# Altium PCB QuarkNPi-Bata0.2-220731.pcbdoc (part 1 of 2)
Units mil, origin at the board's own origin, x right, y up, seen from the top; angles counter-clockwise.
Board outline 5064.99 x 3999.99 mil, 2 copper layers (Top Layer, Bottom Layer); 141 components, 100 nets, 508 pads, 483 vias.
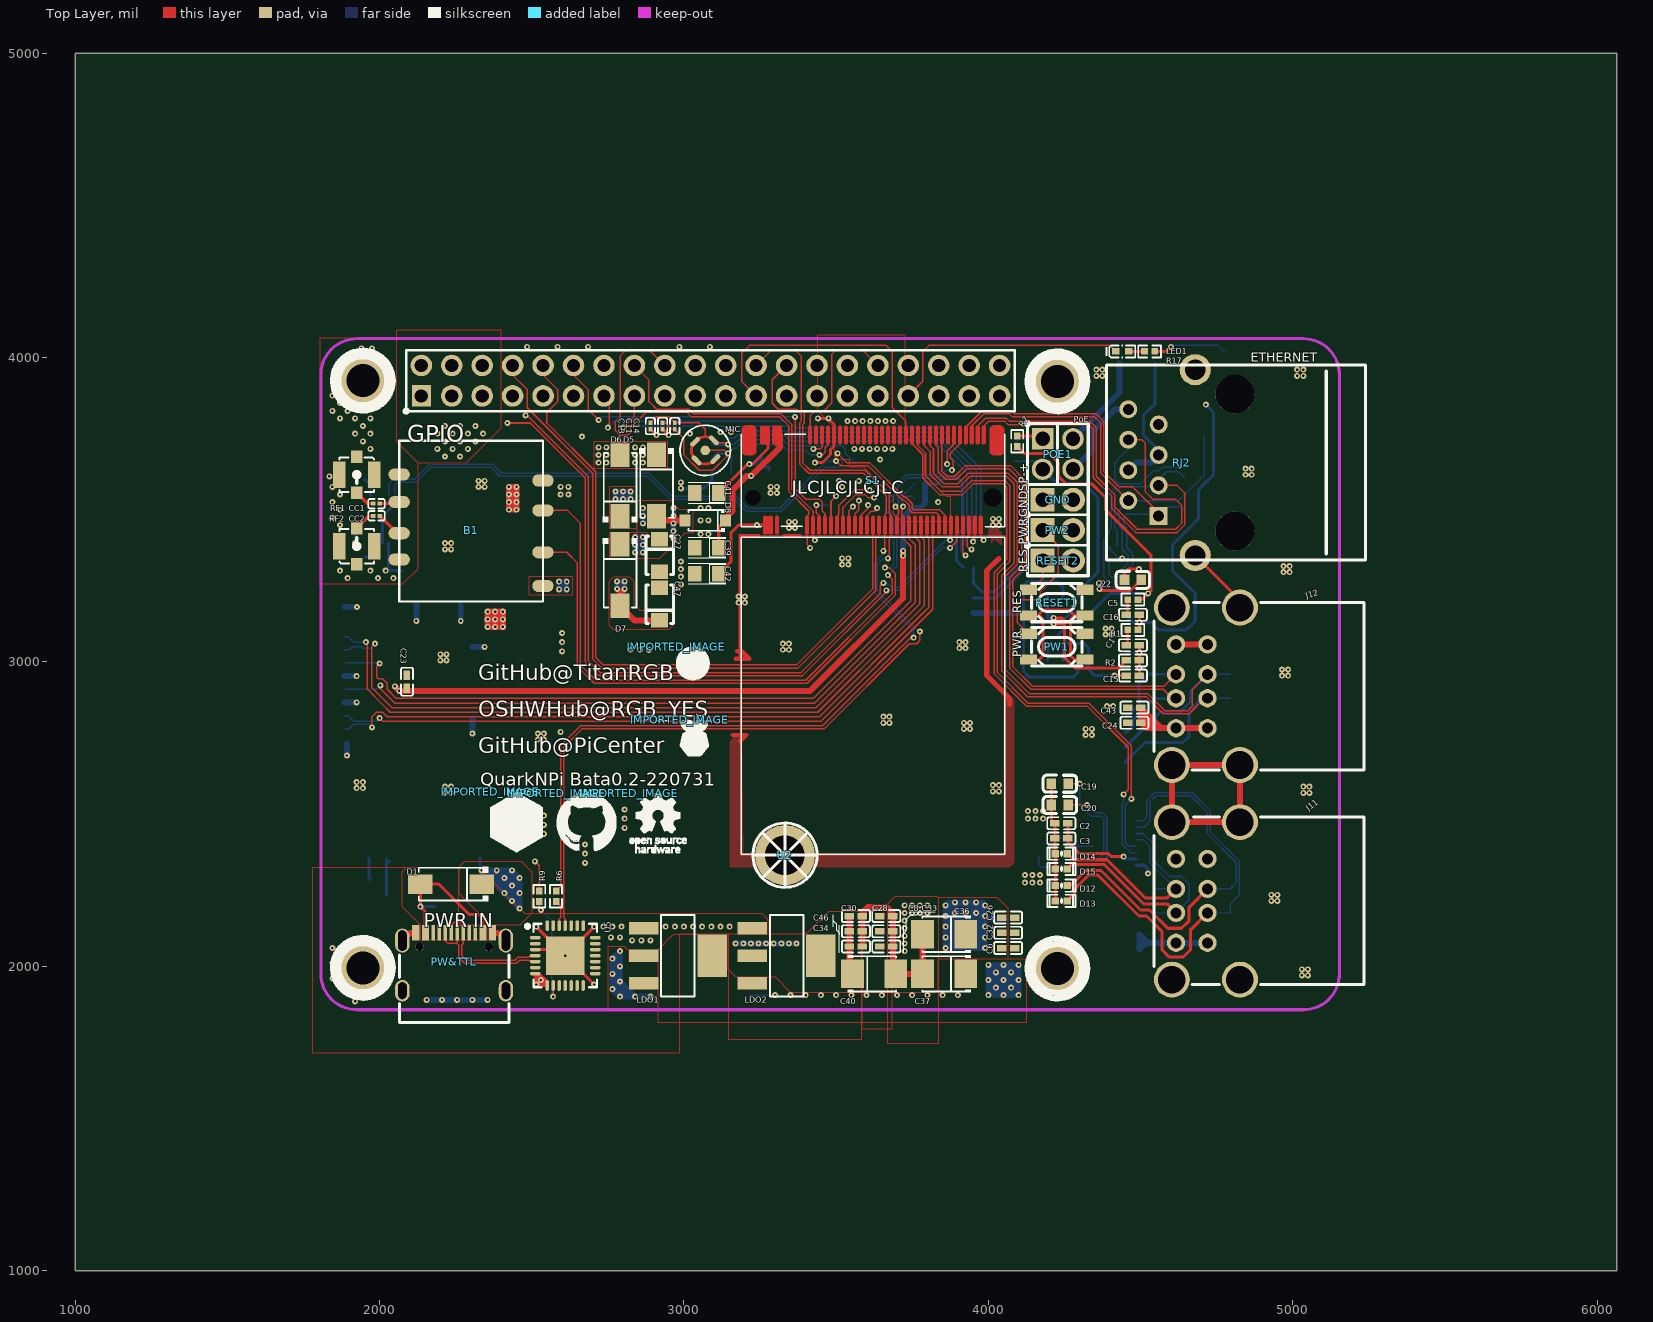
[diagram p0: Top Layer view]
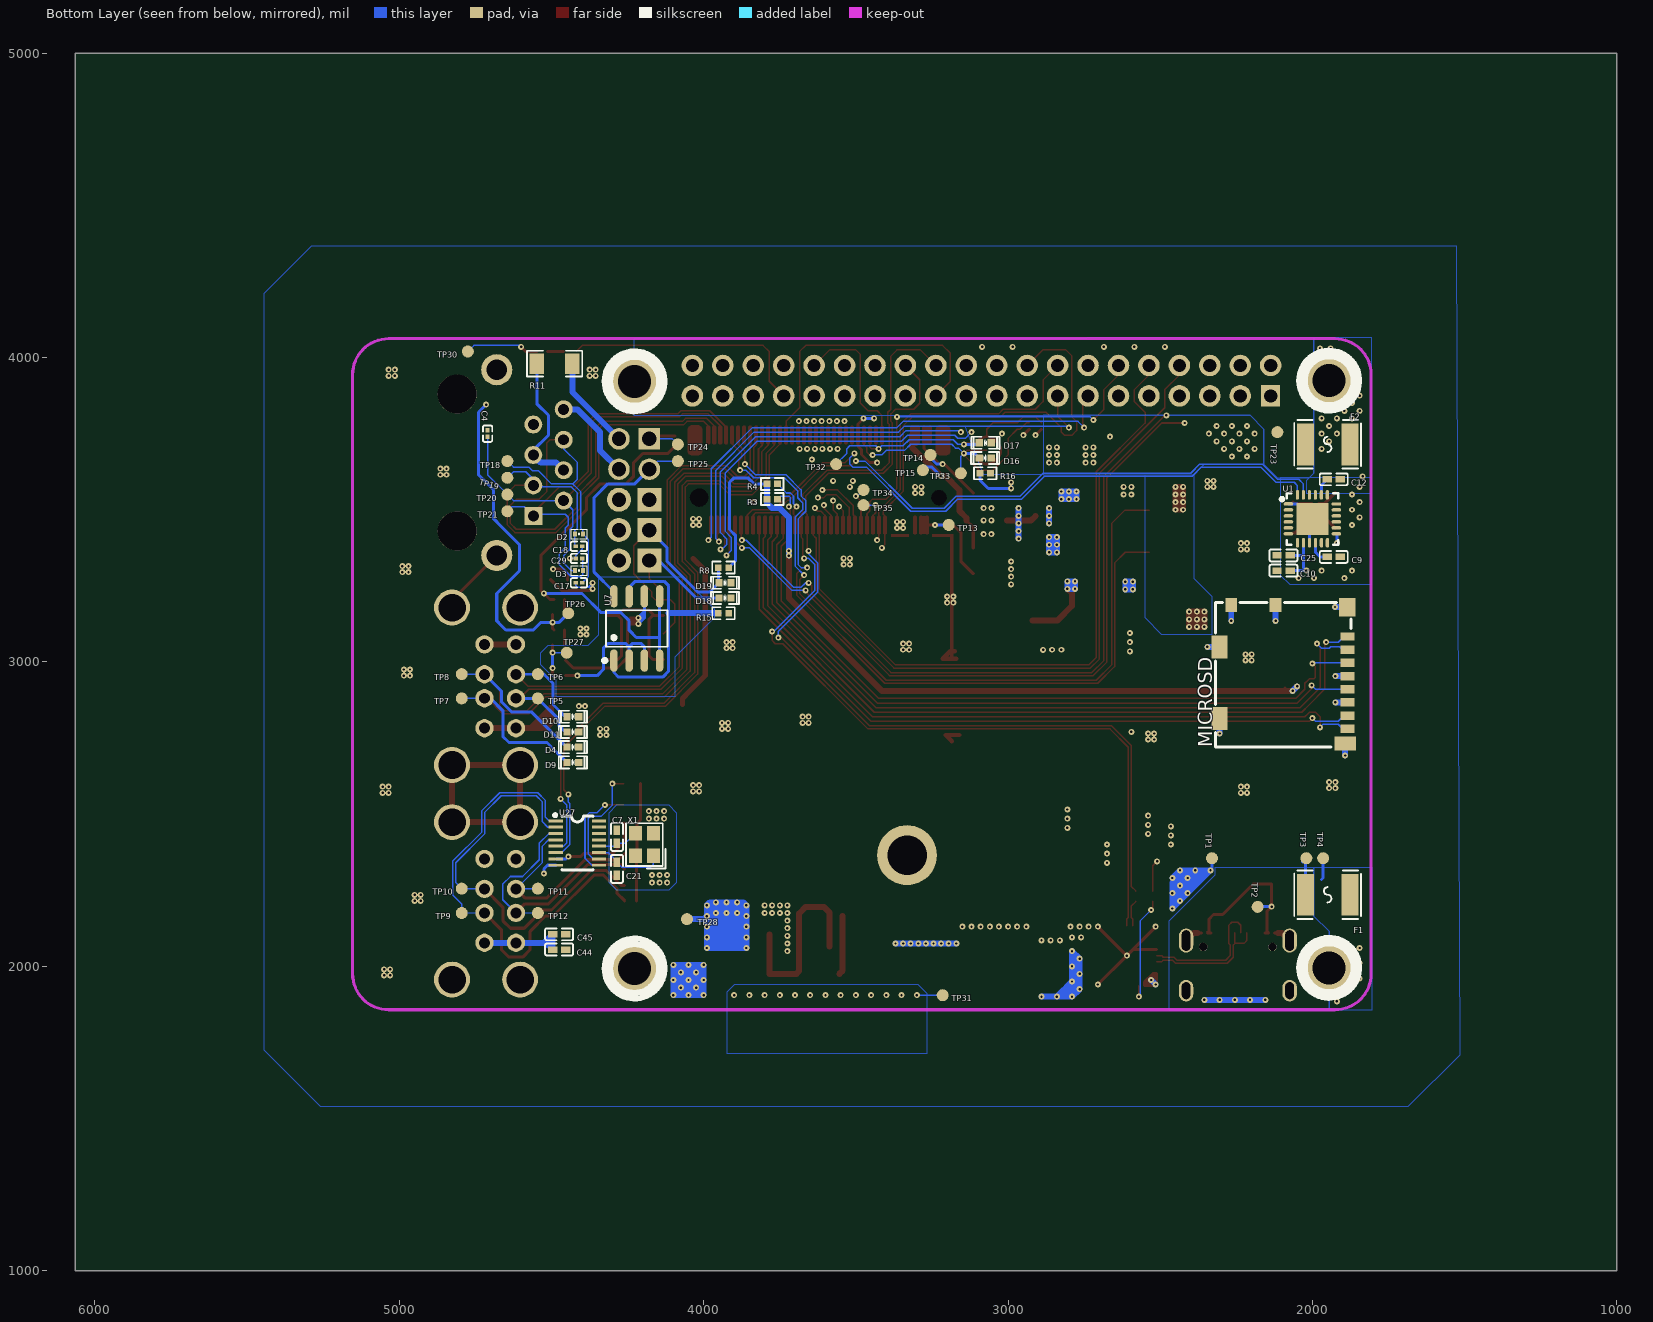
[diagram p1: Bottom Layer view, seen from below]

## Layer stack, top to bottom
Top Layer: signal copper (thickness not stored)
Dielectric: dielectric 12.6, FR-4, Dk 4.8
Bottom Layer: signal copper (thickness not stored)

## Board outline
6064.99,1000 1000,1000 1000,4999.99 6064.99,4999.99

## Components (designator, comment, footprint, x,y, rotation, side; value= is the part's Value field where it differs from the comment)
B1 "RTL8723BU" USB-WIFI-BT-RTL8723BU 2305,3465 r0 top
C1 "330nF" C0402#1 4474.99,3155 r180 top
C2 "22uF" C0402#1 4239.99,2470 r0 top
C3 "10uF" C0402#1 4240,2420 r0 top
C4 "1uF" C0201#1 4709.99,3750 r90 bottom
C5 "10uF" C0402#1 4474.99,3005 r0 top
C6 "100nF" C0402_NEW#1 4064.99,2060 r180 top
C7 "10pF" C0402#2 4284.99,2425 r270 bottom
C8 "100nF" C0402_NEW#1 3665,2115 r180 top
C9 "100nF" C0402_NEW#2 1930,3345 r180 bottom
C10 "10nF" C0402#2 2095,3300 r0 bottom
C11 "33pF" C0201#2 2930,3775 r270 top
C12 "2.2nF" C0402#2 1930,3600 r180 bottom
C13 "33pF" C0201#2 2890,3775 r90 top
C14 "100pF" C0201#2 2970,3775 r270 top
C15 "100nF" C0402#1 4474.99,3055 r0 top
C16 "1uF" C0402#1 4474.99,2955 r180 top
C17 "1uF" C0201#1 4410,3260 r180 bottom
C18 "1uF" C0201#1 4410,3380 r0 bottom
C19 "10uF" C0603 4234.99,2600 r180 top
C20 "10uF" C0603 4234.99,2530 r180 top
C21 "10pF" C0402#2 4284.99,2320 r270 bottom
C22 "1uF" C0603 4474.99,3270 r180 top
C23 "10uF" C0402#1 2090,2935 r270 top
C24 "10uF" C0402#1 4479.99,2800 r180 top
C25 "100nF" C0402_NEW#2 2095,3350 r0 bottom
C26 "10uF" C0402#1 4064.99,2160 r180 top
C27 "4.7uF" CAP-SMD_L3.2-W1.6 2920,3350 r270 top
C28 "10uF" C0402#1 3665,2165 r180 top
C29 "1uF" C0201#1 4410,3340 r0 bottom
C30 "10uF" C0402#1 3565,2165 r180 top
C32 "22uF" C0402#1 4064.99,2110 r180 top
C33 "22uF" C0402#1 3665,2065 r180 top
C34 "22uF" C0402#1 3565,2065 r180 top
C36 "100uF" CAP-SMD_L3.2-W2.8-FD 3855,2105 r180 top
C37 "100uF" CAP-SMD_L3.2-W2.8-FD 3855,1975 r180 top
C39 "22uF" CAP-SMD_L2.0-W1.3-FD 3075,3375 r180 top
C40 "100uF" CAP-SMD_L3.2-W2.8-FD 3625,1975 r0 top
C41 "22uF" CAP-SMD_L2.0-W1.3-FD 3075,3555 r180 top
C42 "22uF" CAP-SMD_L2.0-W1.3-FD 3075,3290 r180 top
C43 "22uF" C0402#1 4479.99,2850 r180 top
C44 "22uF" C0402#2 4474.99,2055 r0 bottom
C45 "10uF" C0402#2 4474.99,2105 r0 bottom
C46 "100nF" C0402_NEW#1 3565,2115 r180 top
C47 "4.7uF" CAP-SMD_L3.2-W1.6 2920,3190 r90 top
CC1 "10pF" C0201#2 1990,3520 r180 top
CC2 "10pF" C0201#2 1990,3480 r180 top
D1 "SS510G" SMA_L4.4-W2.8-LS5.4-RD 2235,2270 r180 top
D2 "EGA10201V05A0" D0201-BI 4409.99,3420 r0 bottom
D3 "EGA10201V05A0" D0201-BI 4409.99,3300 r0 bottom
D4 "ESD5451N-TP" D0402-BI#1 4429.99,2720 r180 bottom
D5 "SS510G" SMA_L4.4-W2.8-LS5.4-RD 2910,3580 r270 top
D6 "SS510G" SMA_L4.4-W2.8-LS5.4-RD 2790,3580 r90 top
D7 "SS510G" SMA_L4.4-W2.8-LS5.4-RD 2790,3285 r270 top
D8 "PMEG4030ER,115" SOD-123_L2.6-W1.7-LS3.5-RD 3070,3465 r180 top
D9 "ESD5451N-TP" D0402-BI#1 4429.99,2670 r180 bottom
D10 "ESD5451N-TP" D0402-BI#1 4429.99,2820 r180 bottom
D11 "ESD5451N-TP" D0402-BI#1 4429.99,2770 r180 bottom
D12 "ESD5451N-TP" D0402-BI#2 4240,2265 r0 top
D13 "ESD5451N-TP" D0402-BI#2 4240,2215 r0 top
D14 "ESD5451N-TP" D0402-BI#2 4240,2370 r0 top
D15 "ESD5451N-TP" D0402-BI#2 4240,2320 r0 top
D16 "ESD5451N-TP" D0402-BI#1 3075,3670 r0 bottom
D17 "ESD5451N-TP" D0402-BI#1 3075,3720 r180 bottom
D18 "ESD5451N-TP" D0402-BI#1 3930,3210 r180 bottom
D19 "ESD5451N-TP" D0402-BI#1 3930,3260 r180 bottom
F1 "mSMD400" F1812 1950,2235 r180 bottom
F2 "mSMD400" F1812 1950,3715 r180 bottom
GND "KH-2.54PH180-1X2P-L11.5" HDR-TH_2P-P2.54-V-M 4228.5,3532.8 r0 top
GPIO "Header-Male-2.54_2x20" HDR-TH_40P-P2.54-V-M-R2-C20-S2.54 3087.2,3924.1 r0 top
IMPORTED_IMAGE "IMPORTED_IMAGE" IMPORTED_IMAGE 2364.15,2573.02 r0 top
IMPORTED_IMAGE "IMPORTED_IMAGE" IMPORTED_IMAGE 2986.92,2809.79 r0 top
IMPORTED_IMAGE "IMPORTED_IMAGE" IMPORTED_IMAGE 2974.21,3050.2 r0 top
IMPORTED_IMAGE "IMPORTED_IMAGE" IMPORTED_IMAGE 2821.14,2568.44 r0 top
IMPORTED_IMAGE "IMPORTED_IMAGE" IMPORTED_IMAGE 2582.03,2569.12 r0 top
J11 "USB-HUB" USB-A-TH_U-USBAR04P-F201 4715,2215 r90 top
J12 "USB-CORE" USB-A-TH_U-USBAR04P-F201 4715,2920 r90 top
LDO1 "1117-5v" SOT-223_L6.5-W3.5-P2.30-LS7.0-BR 2980,2035 r180 top
LDO2 "1117-3V3" SOT-223_L6.5-W3.5-P2.30-LS7.0-BR 3337.65,2035 r180 top
LED1 "WHITE" LED0402-RD_YELLOW 4439.99,4019.99 r0 top
MIC "GMI4013S-2C54DB" MIC-SMD_BD4.0_B4013AM423-008 3070,3695 r0 top
MICROSD "1040310811" SIM-SMD_8P-1040310811 2094.96,2959.96 r270 bottom
POE1 "210-72-02GB01" HDR-TH_4P-P2.54-V-R2-C2-S2.54_A2541WV-2X2P 4228.47,3682.82 r270 top
PW1 "ST-1188" SW-SMD_4P-L4.2-W3.2-P2.15-LS5.2 4225,3049.99 r90 top
PW2 "KH-2.54PH180-1X2P-L11.5" HDR-TH_2P-P2.54-V-M 4228.47,3433.22 r0 top
PW&TTL "KH-TYPE-C-16P" USB-C-SMD_KH-TYPE-C-16P 2244.99,2014.99 r0 top
R1 "20K" R0402#1 4474.99,3205 r0 top
R2 "22Ω" R0402#1 4474.99,3105 r0 top
R3 "47K" R0402#2 3775,3535 r0 bottom
R4 "47K" R0402#2 3775,3585 r0 bottom
R6 "200Ω" R0402#1 2580,2230 r90 top
R7 "75kΩ" R0402#1 4094.99,3725 r90 top
R8 "10kΩ" R0402#2 3935,3310 r180 bottom
R9 "10K" R0402#1 2525,2230 r270 top
R11 "10Ω" R1206 4489.99,3979.99 r0 bottom
R15 "0Ω" R0402#2 3935,3160 r0 bottom
R16 "0Ω" R0402#2 3075,3620 r180 bottom
R17 "470Ω" R0402#1 4529.99,4019.99 r180 top
RESET1 "ST-1188" SW-SMD_4P-L4.2-W3.2-P2.15-LS5.2 4225,3195 r90 top
RESET2 "KH-2.54PH180-1X2P-L11.5" HDR-TH_2P-P2.54-V-M 4228.47,3333.22 r0 top
RF1 "HC-RF-IPEX0303-01" IPEX-SMD_HC-RF-IPEX0303-01 1925,3615 r0 top
RF2 "HC-RF-IPEX0303-01" IPEX-SMD_HC-RF-IPEX0303-01 1925,3380 r180 top
RJ2 "13F-60NW2NL" RJ45-TH_8P-P2.54-S2.54_L21.6-W16.3-EH11.4 4570,3655 r90 top
S1 "Core" QUANTUM-QUARK-N 3680,2940 r90 top
TP1 "TP测试点" TP测试点 2330,2355 r0 bottom
TP2 "TP测试点" TP测试点 2180,2195 r0 bottom
TP3 "TP测试点" TP测试点 2020,2355 r0 bottom
TP4 "TP测试点" TP测试点 1965,2355 r0 bottom
TP5 "TP测试点" TP测试点 4545,2880 r0 bottom
TP6 "TP测试点" TP测试点 4545,2960 r0 bottom
TP7 "TP测试点" TP测试点 4795,2880 r0 bottom
TP8 "TP测试点" TP测试点 4795,2960 r0 bottom
TP9 "TP测试点" TP测试点 4795,2175 r0 bottom
TP10 "TP测试点" TP测试点 4795,2255 r0 bottom
TP11 "TP测试点" TP测试点 4545,2255 r0 bottom
TP12 "TP测试点" TP测试点 4545,2175 r0 bottom
TP13 "TP测试点" TP测试点 3195,3450 r0 bottom
TP14 "TP测试点" TP测试点 3255,3680 r0 bottom
TP15 "TP测试点" TP测试点 3280,3630 r0 bottom
TP18 "TP测试点" TP测试点 4644.99,3660 r0 bottom
TP19 "TP测试点" TP测试点 4644.99,3605 r0 bottom
TP20 "TP测试点" TP测试点 4644.99,3550 r0 bottom
TP21 "TP测试点" TP测试点 4644.99,3495 r0 bottom
TP23 "TP测试点" TP测试点 2115,3755 r0 bottom
TP24 "TP测试点" TP测试点 4084.99,3715 r0 bottom
TP25 "TP测试点" TP测试点 4084.99,3660 r0 bottom
TP26 "TP测试点" TP测试点 4444.99,3160 r0 bottom
TP27 "TP测试点" TP测试点 4449.99,3030 r0 bottom
TP28 "TP测试点" TP测试点 4054.99,2155 r0 bottom
TP30 "TP测试点" TP测试点 4774.99,4019.99 r0 bottom
TP31 "TP测试点" TP测试点 3215,1905 r0 bottom
TP32 "TP测试点" TP测试点 3565,3650 r0 bottom
TP33 "TP测试点" TP测试点 3155,3620 r0 bottom
TP34 "TP测试点" TP测试点 3475,3565 r0 bottom
TP35 "TP测试点" TP测试点 3475,3515 r0 bottom
U1 "MPU-6050_C24112" QFN-24_L4.0-W4.0-P0.50-BL-EP2.7 2000,3470 r90 bottom
U2 "SMTWE2015MTJ" M.2螺孔 3332,2365 r0 top
U5 "CP2102-GMR" WQFN-28_L5.0-W5.0-P0.50-BL-EP3.2 2610,2035 r270 top
U7 "LM4871" SOP-8_L4.9-W3.9-P1.27-LS6.0-BL 4219.99,3110 r0 bottom
U27 "SL2.1S" SSOP-16_L4.6-W2.6-P0.53-LS4.0-BL 4414.99,2405 r90 bottom
X1 "12Mhz" OSC-SMD_4P-L2.5-W2.0-BL 4194.99,2400 r270 bottom

## Footprints (in the part's own frame and the unit in brackets; to place one, negate y for a bottom-side part, rotate by r counter-clockwise, add the part's x,y. Pads: shape width x height; smd on the part's side, far side on the other; paste and mask are expansions set on the pad)
C0201#1 [mil]
  rect 14.51x12.76 smd: 1(10.8,0) 2(-10.8,0)
  silkscreen extent -27,-15 27,15
C0201#2 [mil]
  rect 14.51x12.76 smd: 1(-10.8,0) 2(10.8,0)
  silkscreen extent -27,-15 27,15
C0402#1 [mm]
  rect 0.79x0.54 smd: 1(-0.545,0) 2(0.545,0)
  silkscreen extent -1.17,-0.5 1.17,0.5
C0402#2 [mm]
  rect 0.79x0.54 smd: 1(0.545,0) 2(-0.545,0)
  silkscreen extent -1.17,-0.5 1.17,0.5
C0402_NEW#1 [mm]
  rect 0.79x0.54 smd: 1(-0.545,0) 2(0.545,0)
  silkscreen extent -1.17,-0.5 1.17,0.5
C0402_NEW#2 [mm]
  rect 0.79x0.54 smd: 1(0.545,0) 2(-0.545,0)
  silkscreen extent -1.17,-0.5 1.17,0.5
C0603 [mm]
  rect 0.8x0.9 smd: 1(-0.7,0) 2(0.7,0)
  silkscreen extent -1.41,-0.71 1.39,0.72
CAP-SMD_L2.0-W1.3-FD [mm]
  rect 1.1x1.3 smd: 1(-1,0) 2(1,0)
  silkscreen extent -1.57,-0.89 1.52,0.89
CAP-SMD_L3.2-W1.6 [mm]
  rect 1.2x1.4 smd: 1(-1.35,0) 2(1.35,0)
  silkscreen extent -1.6,-1.14 1.6,1.14
CAP-SMD_L3.2-W2.8-FD [mm]
  rect 1.9x2.376 smd: 1(-1.799,0) 2(1.798,0)
  silkscreen extent -2.21,-1.55 1.83,1.55
D0201-BI [mil]
  rect 13.8x16 smd: 1(13,0) 2(-13,0)
  silkscreen extent -27,-15 27,15
D0402-BI#1 [mm]
  rect 0.6x0.6 smd: 1(0.5,0) 2(-0.5,0)
  silkscreen extent -1.17,-0.51 1.18,0.5
D0402-BI#2 [mm]
  rect 0.6x0.6 smd: 1(-0.5,0) 2(0.5,0)
  silkscreen extent -1.18,-0.5 1.17,0.51
F1812 [mil]
  rect 55.38x137.76 smd: 1(72.97,0) 2(-72.97,0)
  silkscreen extent -110,-80 110,80
HDR-TH_2P-P2.54-V-M [mm]
  rect 2x2 hole 1.2: 1(-1.27,0)
  round 2 hole 1.2: 2(1.27,0)
  silkscreen extent -2.54,-1.27 2.54,1.27
HDR-TH_4P-P2.54-V-R2-C2-S2.54_A2541WV-2X2P [mm]
  rect 1.8x1.8 hole 1.2: 1(-1.27,-1.27)
  round 1.8 hole 1.2: 2(-1.27,1.27) 3(1.27,-1.27) 4(1.27,1.27)
  silkscreen extent -2.54,-2.54 2.54,2.54
HDR-TH_40P-P2.54-V-M-R2-C20-S2.54 [mm]
  rect 1.575x1.8 hole 1.1: 1(-24.13,-1.27)
  round 1.8 hole 1.1: 2(-24.13,1.27) 3(-21.59,-1.27) 4(-21.59,1.27) 5(-19.05,-1.27) 6(-19.05,1.27) 7(-16.51,-1.27) 8(-16.51,1.27) 9(-13.97,-1.27) 10(-13.97,1.27) 11(-11.43,-1.27) 12(-11.43,1.27) 13(-8.89,-1.27) 14(-8.89,1.27) 15(-6.35,-1.27) 16(-6.35,1.27) 17(-3.81,-1.27) 18(-3.81,1.27) 19(-1.27,-1.27) 20(-1.27,1.27) 21(1.27,-1.27) 22(1.27,1.27) 23(3.81,-1.27) 24(3.81,1.27) 25(6.35,-1.27) 26(6.35,1.27) 27(8.89,-1.27) 28(8.89,1.27) 29(11.43,-1.27) 30(11.43,1.27) 31(13.97,-1.27) 32(13.97,1.27) 33(16.51,-1.27) 34(16.51,1.27) 35(19.05,-1.27) 36(19.05,1.27) 37(21.59,-1.27) 38(21.59,1.27) 39(24.13,-1.27) 40(24.13,1.27)
  silkscreen extent -25.4,-2.54 25.4,2.54
IMPORTED_IMAGE [mil]
  silkscreen extent 0,-199 172,0
IPEX-SMD_HC-RF-IPEX0303-01 [mm]
  rect 1x1.05 smd: 1(0,-1.5) 4(0,1.5)
  rect 1.05x2.2 smd: 2(1.475,0) 3(-1.475,0)
  silkscreen extent -1.45,-1.45 1.45,1.45
LED0402-RD_YELLOW [mm]
  rect 0.636x0.54 smd: 1(-0.538,0) 2(0.538,0)
  silkscreen extent -1.39,-0.54 1.09,0.54
M.2螺孔 [mm]
  round 5 hole 3.3: 1(0,0)
MIC-SMD_BD4.0_B4013AM423-008 [mm]
  round 0.8 smd: 1(0,0)
  oval 1x0.4 smd rot 45: 2(-0.844,0.725) 2(0.844,-0.725)
  oval 1x0.4 smd rot 135: 2(-0.725,-0.844) 2(0.725,0.844)
  silkscreen extent -2.1,-2.1 2.1,2.1
OSC-SMD_4P-L2.5-W2.0-BL [mm]
  rect 1.2x1.1 smd: 1(0.95,0.75) 2(-0.95,0.75) 3(-0.95,-0.75) 4(0.95,-0.75)
  silkscreen extent -1.78,-1.53 2.01,1.76
QFN-24_L4.0-W4.0-P0.50-BL-EP2.7 [mm]
  oval 0.28x0.8 smd: 1(1.25,2) 2(0.75,2) 3(0.25,2) 4(-0.25,2) 5(-0.75,2) 6(-1.25,2) 13(-1.25,-2) 14(-0.75,-2) 15(-0.25,-2) 16(0.25,-2) 17(0.75,-2) 18(1.242,-2)
  oval 0.8x0.28 smd: 7(-2,1.25) 8(-2,0.75) 9(-2,0.25) 10(-2,-0.25) 11(-2,-0.75) 12(-2,-1.25) 19(2,-1.25) 20(2,-0.75) 21(2,-0.25) 22(2,0.25) 23(2,0.75) 24(2,1.25)
  rect 2.7x2.7 smd: 25(-0.012,0)
  silkscreen extent -2.16,-2.15 2.14,2.79
QUANTUM-QUARK-N [mm]
  round 0 smd: 0(20.007,-8.851) 0(20.007,11.849) 1(20.464,10.749) 2(12.939,10.499) 3(20.464,10.249) 4(12.939,9.999) 5(20.464,9.749) 6(12.939,9.499) 7(20.464,9.249) 16(12.939,6.999) 17(20.464,6.749) 18(12.939,6.499) 19(20.464,6.249) 20(12.939,5.999) 21(20.464,5.749) 22(12.939,5.499) 23(20.464,5.249) 24(12.939,4.999) 25(20.464,4.749) 26(12.939,4.499) 27(20.464,4.249) 28(12.939,3.999) 29(20.464,3.749) 30(12.939,3.499) 31(20.464,3.249) 32(12.939,2.999) 33(20.464,2.749) 34(12.939,2.499) 35(20.464,2.249) 36(12.939,1.999) 37(20.464,1.749) 38(12.939,1.499) 39(20.464,1.249) 40(12.939,0.999) 41(20.464,0.749) 42(12.939,0.499) 43(20.464,0.249) 44(12.939,-0.001) 45(20.464,-0.251) 46(12.939,-0.501) 47(20.464,-0.751) 48(12.939,-1.001) 49(20.464,-1.251) 50(12.939,-1.501) 51(20.464,-1.751) 52(12.939,-2.001) 53(20.464,-2.251) 54(12.939,-2.501) 55(20.464,-2.751) 56(12.939,-3.001) 57(20.464,-3.251) 58(12.939,-3.501) 59(20.464,-3.751) 60(12.939,-4.001) 61(20.464,-4.251) 62(12.939,-4.501) 63(20.464,-4.751) 64(12.939,-5.001) 65(20.464,-5.251) 66(12.939,-5.501) 67(20.464,-5.751) 68(12.939,-6.001) 69(20.464,-6.251) 70(12.939,-6.501) 71(20.464,-6.751) 72(12.939,-7.001) 73(20.464,-7.251) 74(12.939,-7.501) 75(20.464,-7.751)
  round 0.6 hole 1.524 slot 1.529 at 90 deg unplated: MH1(15.24,-8.509)
  round 0.6 hole 1.27 slot 1.275 at 90 deg unplated: MH2(15.24,11.506)
  Top Layer region: 19.689,4.674 19.764,4.599 21.164,4.599 21.239,4.674 21.239,4.824 21.164,4.899 19.764,4.899 19.689,4.824
  Top Layer region: 19.689,4.174 19.764,4.099 21.164,4.099 21.239,4.174 21.239,4.324 21.164,4.399 19.764,4.399 19.689,4.324
  Top Layer region: 19.689,3.174 19.764,3.099 21.164,3.099 21.239,3.174 21.239,3.324 21.164,3.399 19.764,3.399 19.689,3.324
  Top Layer region: 19.689,3.674 19.764,3.599 21.164,3.599 21.239,3.674 21.239,3.824 21.164,3.899 19.764,3.899 19.689,3.824
  Top Layer region: 12.164,6.424 12.239,6.349 13.639,6.349 13.714,6.424 13.714,6.574 13.639,6.649 12.239,6.649 12.164,6.574
  Top Layer region: 12.164,6.924 12.239,6.849 13.639,6.849 13.714,6.924 13.714,7.074 13.639,7.149 12.239,7.149 12.164,7.074
  Top Layer region: 12.164,10.424 12.239,10.349 13.639,10.349 13.714,10.424 13.714,10.574 13.639,10.649 12.239,10.649 12.164,10.574
  Top Layer region: 12.164,9.924 12.239,9.849 13.639,9.849 13.714,9.924 13.714,10.074 13.639,10.149 12.239,10.149 12.164,10.074
  Top Layer region: 12.164,-6.576 12.239,-6.651 13.639,-6.651 13.714,-6.576 13.714,-6.426 13.639,-6.351 12.239,-6.351 12.164,-6.426
  Top Layer region: 12.164,-7.076 12.239,-7.151 13.639,-7.151 13.714,-7.076 13.714,-6.926 13.639,-6.851 12.239,-6.851 12.164,-6.926
  Top Layer region: 12.164,-7.576 12.239,-7.651 13.639,-7.651 13.714,-7.576 13.714,-7.426 13.639,-7.351 12.239,-7.351 12.164,-7.426
  Top Layer region: 19.689,9.174 19.764,9.099 21.164,9.099 21.239,9.174 21.239,9.324 21.164,9.399 19.764,9.399 19.689,9.324
  Top Layer region: 12.164,9.424 12.239,9.349 13.639,9.349 13.714,9.424 13.714,9.574 13.639,9.649 12.239,9.649 12.164,9.574
  Top Layer region: 12.164,-4.076 12.239,-4.151 13.639,-4.151 13.714,-4.076 13.714,-3.926 13.639,-3.851 12.239,-3.851 12.164,-3.926
  Top Layer region: 19.689,-3.826 19.764,-3.901 21.164,-3.901 21.239,-3.826 21.239,-3.676 21.164,-3.601 19.764,-3.601 19.689,-3.676
  Top Layer region: 12.164,0.424 12.239,0.349 13.639,0.349 13.714,0.424 13.714,0.574 13.639,0.649 12.239,0.649 12.164,0.574
  Top Layer region: 12.164,-3.576 12.239,-3.651 13.639,-3.651 13.714,-3.576 13.714,-3.426 13.639,-3.351 12.239,-3.351 12.164,-3.426
  Top Layer region: 12.164,1.924 12.239,1.849 13.639,1.849 13.714,1.924 13.714,2.074 13.639,2.149 12.239,2.149 12.164,2.074
  Top Layer region: 12.164,0.924 12.239,0.849 13.639,0.849 13.714,0.924 13.714,1.074 13.639,1.149 12.239,1.149 12.164,1.074
  Top Layer region: 12.164,-3.076 12.239,-3.151 13.639,-3.151 13.714,-3.076 13.714,-2.926 13.639,-2.851 12.239,-2.851 12.164,-2.926
  Top Layer region: 19.689,-4.326 19.764,-4.401 21.164,-4.401 21.239,-4.326 21.239,-4.176 21.164,-4.101 19.764,-4.101 19.689,-4.176
  Top Layer region: 12.164,-4.576 12.239,-4.651 13.639,-4.651 13.714,-4.576 13.714,-4.426 13.639,-4.351 12.239,-4.351 12.164,-4.426
  Top Layer region: 12.164,-5.076 12.239,-5.151 13.639,-5.151 13.714,-5.076 13.714,-4.926 13.639,-4.851 12.239,-4.851 12.164,-4.926
  Top Layer region: 19.689,-4.826 19.764,-4.901 21.164,-4.901 21.239,-4.826 21.239,-4.676 21.164,-4.601 19.764,-4.601 19.689,-4.676
  Top Layer region: 12.164,2.424 12.239,2.349 13.639,2.349 13.714,2.424 13.714,2.574 13.639,2.649 12.239,2.649 12.164,2.574
  Top Layer region: 19.689,1.674 19.764,1.599 21.164,1.599 21.239,1.674 21.239,1.824 21.164,1.899 19.764,1.899 19.689,1.824
  Top Layer region: 12.164,-0.576 12.239,-0.651 13.639,-0.651 13.714,-0.576 13.714,-0.426 13.639,-0.351 12.239,-0.351 12.164,-0.426
  Top Layer region: 12.164,-2.576 12.239,-2.651 13.639,-2.651 13.714,-2.576 13.714,-2.426 13.639,-2.351 12.239,-2.351 12.164,-2.426
  Top Layer region: 12.164,2.924 12.239,2.849 13.639,2.849 13.714,2.924 13.714,3.074 13.639,3.149 12.239,3.149 12.164,3.074
  Top Layer region: 19.689,2.174 19.764,2.099 21.164,2.099 21.239,2.174 21.239,2.324 21.164,2.399 19.764,2.399 19.689,2.324
  Top Layer region: 12.164,-0.076 12.239,-0.151 13.639,-0.151 13.714,-0.076 13.714,0.074 13.639,0.149 12.239,0.149 12.164,0.074
  Top Layer region: 12.164,-2.076 12.239,-2.151 13.639,-2.151 13.714,-2.076 13.714,-1.926 13.639,-1.851 12.239,-1.851 12.164,-1.926
  Top Layer region: 12.164,-1.576 12.239,-1.651 13.639,-1.651 13.714,-1.576 13.714,-1.426 13.639,-1.351 12.239,-1.351 12.164,-1.426
  Top Layer region: 19.689,0.174 19.764,0.099 21.164,0.099 21.239,0.174 21.239,0.324 21.164,0.399 19.764,0.399 19.689,0.324
  Top Layer region: 19.689,0.674 19.764,0.599 21.164,0.599 21.239,0.674 21.239,0.824 21.164,0.899 19.764,0.899 19.689,0.824
  Top Layer region: 19.689,-1.326 19.764,-1.401 21.164,-1.401 21.239,-1.326 21.239,-1.176 21.164,-1.101 19.764,-1.101 19.689,-1.176
  Top Layer region: 19.689,-0.826 19.764,-0.901 21.164,-0.901 21.239,-0.826 21.239,-0.676 21.164,-0.601 19.764,-0.601 19.689,-0.676
  Top Layer region: 19.689,-2.826 19.764,-2.901 21.164,-2.901 21.239,-2.826 21.239,-2.676 21.164,-2.601 19.764,-2.601 19.689,-2.676
  Top Layer region: 19.689,-2.326 19.764,-2.401 21.164,-2.401 21.239,-2.326 21.239,-2.176 21.164,-2.101 19.764,-2.101 19.689,-2.176
  Top Layer region: 19.689,1.174 19.764,1.099 21.164,1.099 21.239,1.174 21.239,1.324 21.164,1.399 19.764,1.399 19.689,1.324
  Top Layer region: 19.689,-0.326 19.764,-0.401 21.164,-0.401 21.239,-0.326 21.239,-0.176 21.164,-0.101 19.764,-0.101 19.689,-0.176
  Top Layer region: 19.689,-1.826 19.764,-1.901 21.164,-1.901 21.239,-1.826 21.239,-1.676 21.164,-1.601 19.764,-1.601 19.689,-1.676
  Top Layer region: 19.689,-3.326 19.764,-3.401 21.164,-3.401 21.239,-3.326 21.239,-3.176 21.164,-3.101 19.764,-3.101 19.689,-3.176
  Top Layer region: 19.689,-6.826 19.764,-6.901 21.164,-6.901 21.239,-6.826 21.239,-6.676 21.164,-6.601 19.764,-6.601 19.689,-6.676
  Top Layer region: 19.689,-7.326 19.764,-7.401 21.164,-7.401 21.239,-7.326 21.239,-7.176 21.164,-7.101 19.764,-7.101 19.689,-7.176
  Top Layer region: 12.164,5.424 12.239,5.349 13.639,5.349 13.714,5.424 13.714,5.574 13.639,5.649 12.239,5.649 12.164,5.574
  Top Layer region: 19.689,5.674 19.764,5.599 21.164,5.599 21.239,5.674 21.239,5.824 21.164,5.899 19.764,5.899 19.689,5.824
  Top Layer region: 12.164,5.924 12.239,5.849 13.639,5.849 13.714,5.924 13.714,6.074 13.639,6.149 12.239,6.149 12.164,6.074
  Top Layer region: 12.164,-6.076 12.239,-6.151 13.639,-6.151 13.714,-6.076 13.714,-5.926 13.639,-5.851 12.239,-5.851 12.164,-5.926
  Top Layer region: 19.689,-6.326 19.764,-6.401 21.164,-6.401 21.239,-6.326 21.239,-6.176 21.164,-6.101 19.764,-6.101 19.689,-6.176
  Top Layer region: 19.689,-7.826 19.764,-7.901 21.164,-7.901 21.239,-7.826 21.239,-7.676 21.164,-7.601 19.764,-7.601 19.689,-7.676
  Top Layer region: 19.689,-5.826 19.764,-5.901 21.164,-5.901 21.239,-5.826 21.239,-5.676 21.164,-5.601 19.764,-5.601 19.689,-5.676
  Top Layer region: 19.689,-5.326 19.764,-5.401 21.164,-5.401 21.239,-5.326 21.239,-5.176 21.164,-5.101 19.764,-5.101 19.689,-5.176
  Top Layer region: 12.164,-5.576 12.239,-5.651 13.639,-5.651 13.714,-5.576 13.714,-5.426 13.639,-5.351 12.239,-5.351 12.164,-5.426
  Top Layer region: 12.164,-1.076 12.239,-1.151 13.639,-1.151 13.714,-1.076 13.714,-0.926 13.639,-0.851 12.239,-0.851 12.164,-0.926
  Top Layer region: 19.689,10.174 19.764,10.099 21.164,10.099 21.239,10.174 21.239,10.324 21.164,10.399 19.764,10.399 19.689,10.324
  Top Layer region: 19.689,9.674 19.764,9.599 21.164,9.599 21.239,9.674 21.239,9.824 21.164,9.899 19.764,9.899 19.689,9.824
  Top Layer region: 19.689,10.674 19.764,10.599 21.164,10.599 21.239,10.674 21.239,10.824 21.164,10.899 19.764,10.899 19.689,10.824
  Top Layer region: 18.757,-9.151 18.845,-9.364 19.057,-9.451 20.957,-9.451 21.169,-9.364 21.257,-9.151 21.257,-8.551 21.169,-8.339 20.957,-8.251 19.057,-8.251 18.845,-8.339 18.757,-8.551
  Top Layer region: 18.757,11.549 18.845,11.337 19.057,11.249 20.957,11.249 21.169,11.337 21.257,11.549 21.257,12.149 21.169,12.361 20.957,12.449 19.057,12.449 18.845,12.361 18.757,12.149
  Top Layer region: 19.689,5.174 19.764,5.099 21.164,5.099 21.239,5.174 21.239,5.324 21.164,5.399 19.764,5.399 19.689,5.324
  Top Layer region: 19.689,2.674 19.764,2.599 21.164,2.599 21.239,2.674 21.239,2.824 21.164,2.899 19.764,2.899 19.689,2.824
  Top Layer region: 12.164,1.424 12.239,1.349 13.639,1.349 13.714,1.424 13.714,1.574 13.639,1.649 12.239,1.649 12.164,1.574
  Top Layer region: 19.689,6.174 19.764,6.099 21.164,6.099 21.239,6.174 21.239,6.324 21.164,6.399 19.764,6.399 19.689,6.324
  Top Layer region: 19.689,6.674 19.764,6.599 21.164,6.599 21.239,6.674 21.239,6.824 21.164,6.899 19.764,6.899 19.689,6.824
  Top Layer region: 12.164,3.924 12.239,3.849 13.639,3.849 13.714,3.924 13.714,4.074 13.639,4.149 12.239,4.149 12.164,4.074
  Top Layer region: 12.164,3.424 12.239,3.349 13.639,3.349 13.714,3.424 13.714,3.574 13.639,3.649 12.239,3.649 12.164,3.574
  Top Layer region: 12.164,4.924 12.239,4.849 13.639,4.849 13.714,4.924 13.714,5.074 13.639,5.149 12.239,5.149 12.164,5.074
  Top Layer region: 12.164,4.424 12.239,4.349 13.639,4.349 13.714,4.424 13.714,4.574 13.639,4.649 12.239,4.649 12.164,4.574
  silkscreen extent -17.28,-9.5 20.54,12.5
R0402#1 [mm]
  rect 0.566x0.54 smd: 1(-0.433,0) 2(0.433,0)
  silkscreen extent -0.94,-0.5 0.94,0.5
R0402#2 [mm]
  rect 0.566x0.54 smd: 1(0.433,0) 2(-0.433,0)
  silkscreen extent -0.94,-0.5 0.94,0.5
R1206 [mil]
  rect 47.54x66.97 smd: 1(58.22,0) 2(-58.22,0)
  silkscreen extent -91,-42 91,42
RJ45-TH_8P-P2.54-S2.54_L21.6-W16.3-EH11.4 [mil]
  round 102.36 hole 66.93: 0(-305.12,-110.04) 0(305.12,-110.04)
  rect 59x59 hole 36: 1(-175,10.04)
  round 59 hole 36: 2(-125,110.04) 3(-75,10.04) 4(-25,110.04) 5(25,10.04) 6(75,110.04) 7(125,10.04) 8(175,110.04)
  round 127.95 hole 127.95 unplated: ""(-225,-240.35) ""(225,-240.35)
  silkscreen extent -320,-669 320,181
SIM-SMD_8P-1040310811 [mm]
  rect 0.7x1.2 smd: 1(-3.138,5.338) 2(-2.038,5.338) 3(-0.938,5.338) 4(0.162,5.338) 5(1.262,5.338) 6(2.362,5.338) 7(3.462,5.338) 8(4.562,5.337)
  rect 1.17x1.8 smd: 9(5.772,5.138)
  rect 1.55x1.35 smd: 10(-5.598,5.312)
  rect 1.2x1 smd: 11(-5.773,-0.663) 12(-5.773,-4.363)
  rect 1.9x1.35 smd: 13(-2.273,-5.338) 14(3.697,-5.338)
  silkscreen extent -5.99,-5.67 6.07,5.64
SMA_L4.4-W2.8-LS5.4-RD [mm]
  rect 2.046x1.62 smd: 1(-2.566,0) 2(2.565,0)
  silkscreen extent -3.08,-1.44 2.7,1.44
SOD-123_L2.6-W1.7-LS3.5-RD [mm]
  rect 0.9x1 smd: 1(-1.693,0) 2(1.693,0)
  silkscreen extent -1.63,-0.94 1.41,0.94
SOP-8_L4.9-W3.9-P1.27-LS6.0-BL [mm]
  oval 0.63x1.865 smd: 1(1.905,2.682) 2(0.635,2.682) 3(-0.635,2.682) 4(-1.905,2.682) 5(-1.905,-2.682) 6(-0.635,-2.682) 7(0.635,-2.682) 8(1.905,-2.682)
  silkscreen extent -2.58,-1.52 2.82,2.83
SOT-223_L6.5-W3.5-P2.30-LS7.0-BR [mm]
  rect 2.465x1.05 smd: 1(2.858,-2.3) 2(2.857,0) 3(2.857,2.3)
  rect 2.465x3.54 smd: 4(-2.857,0)
  silkscreen extent -1.4,-3.4 1.4,3.4
SSOP-16_L4.6-W2.6-P0.53-LS4.0-BL [mm]
  rect 0.25x1.2 smd: 1(1.855,1.8) 2(1.325,1.8) 3(0.795,1.8) 4(0.265,1.8) 5(-0.265,1.8) 6(-0.795,1.8) 7(-1.325,1.8) 8(-1.855,1.8) 9(-1.855,-1.8) 10(-1.325,-1.8) 11(-0.795,-1.8) 12(-0.265,-1.8) 13(0.265,-1.8) 14(0.795,-1.8) 15(1.325,-1.8) 16(1.855,-1.8)
  silkscreen extent -2.25,-1.3 2.45,1.99
SW-SMD_4P-L4.2-W3.2-P2.15-LS5.2 [mm]
  rect 0.85x1.4 smd: 1(1.075,2.35) 2(1.075,-2.35) 3(-1.075,2.35) 4(-1.075,-2.35)
  silkscreen extent -1.6,-2.1 1.6,2.1
TP测试点 [mm]
  round 1 smd: 1(0,0)
USB-A-TH_U-USBAR04P-F201 [mm]
  round 1.524 hole 0.914: 1(-3.5,2.49) 2(-1,2.49) 3(1,2.49) 4(3.5,2.49) 5(-3.5,-0.13) 6(-1,-0.13) 7(1,-0.13) 8(3.5,-0.13)
  round 3 hole 2.3: 9(-6.57,-2.84) 9(-6.57,2.84) 9(6.57,-2.84) 9(6.57,2.84)
  silkscreen extent -6.98,-13.21 6.99,4.32
USB-C-SMD_KH-TYPE-C-16P [mm]
  oval 1.2x2 hole 0.7 slot 1.7 at 90 deg: 1(-4.32,1.765) 2(4.32,1.765)
  oval 1.2x1.8 hole 0.7 slot 1.4 at 90 deg: 3(-4.32,-2.415) 4(4.32,-2.415)
  rect 0.3x1.3 smd: A1(-3.35,2.415) A4(-2.55,2.415) A5(-1.25,2.415) A6(-0.25,2.415) A7(0.25,2.415) A8(1.25,2.415) A9(2.55,2.415) A12(3.35,2.415) B1(3.05,2.415) B4(2.25,2.415) B5(1.75,2.415) B6(0.75,2.415) B7(-0.75,2.415) B8(-1.75,2.415) B9(-2.25,2.415) B12(-3.05,2.415)
  round 0.7 hole 0.7 unplated: ""(-2.89,1.235) ""(2.89,1.235)
  silkscreen extent -4.57,-5.08 4.57,0.57
USB-WIFI-BT-RTL8723BU [mil]
  oval 70x40 smd: 1(-240.63,150.94) 2(-240.63,60.39) 3(-240.63,-41.97) 4(-240.63,-128.58) 5(231.81,-215.2) 6(231.81,-104.96) 7(231.81,32.83) 8(231.81,131.26)
  silkscreen extent -241,-266 232,261
WQFN-28_L5.0-W5.0-P0.50-BL-EP3.2 [mm]
  oval 0.28x0.9 smd: 1(-1.501,-2.5) 2(-1.001,-2.5) 3(-0.501,-2.5) 4(0,-2.5) 5(0.5,-2.5) 6(1.001,-2.5) 7(1.501,-2.5) 15(1.501,2.5) 16(1.001,2.5) 17(0.5,2.5) 18(0,2.5) 19(-0.501,2.5) 20(-1.001,2.5) 21(-1.501,2.5)
  oval 0.9x0.28 smd: 8(2.5,-1.501) 9(2.5,-1.001) 10(2.5,-0.5) 11(2.5,0) 12(2.5,0.5) 13(2.5,1.001) 14(2.5,1.501) 22(-2.5,1.501) 23(-2.5,1.001) 24(-2.5,0.5) 25(-2.5,0) 26(-2.5,-0.5) 27(-2.5,-1.001) 28(-2.5,-1.501)
  rect 3.2x3.2 smd: 29(0,0)
  silkscreen extent -2.65,-3.3 2.65,2.65

## Free pads (board coordinates)
  round 157.48 hole 108.27 unplated: 1(1945,1995) 1(1945,3924.13) 1(4227.2,1992.8) 1(4227.2,3921.93)

## Via types
v1: diameter 19.69, hole 7.87, Top Layer to Bottom Layer, tented both sides, 483 vias

## Nets (pads, with @x,y where several pads share a name; then routed paths per layer and width w, separated by ;. In a path a pad name is that pad's centre, name@x,y a point inside that pad or via, vN(x,y) a via of type N, cw(c..) or ccw(c..) an arc to the next point about the centre after c; other vN are vias at no path point)
5V_IN: C6.2 C26.2 C32.2 C36.1 D1.1 D6.1 LDO1.3 TP1.1 TP28.1 | length 8946.8
  Top Layer w19.68: v1(2355,3140) v1(2405,3140) ; v1(2380,3115) v1(2380,3165) ; v1(2425,3525) v1(2450,3500) ; v1(2425,3550) v1(2450,3525) ; v1(2450,3550) v1(2425,3575) ; v1(2355,3115) v1(2355,3165) ; v1(2355,3115) v1(2405,3115) ; v1(2355,3115) v1(2405,3165) ; v1(2355,3165) v1(2405,3165) ; v1(2355,3165) v1(2405,3115) ; v1(2405,3115) v1(2405,3165) ; v1(2425,3575) v1(2425,3500) v1(2450,3500) ; v1(2425,3575) v1(2450,3575) v1(2450,3500)
  Mid-Layer 1 w19.68: v1(2355,3140) v1(2405,3140) ; v1(2380,3115) v1(2380,3165) ; v1(2425,3525) v1(2450,3500) ; v1(2425,3550) v1(2450,3525) ; v1(2450,3550) v1(2425,3575) ; v1(2800,3535) v1(2775,3560) ; v1(2800,3560) v1(2825,3535) ; v1(2840,1900) v1(2790,1950) v1(2790,2050) v1(2765,2025) v1(2765,1925) v1(2790,1900) v1(2890,1900) ; v1(2355,3115) v1(2405,3165) ; v1(2355,3115) v1(2405,3115) ; v1(2355,3115) v1(2355,3165) ; v1(2355,3165) v1(2405,3115) ; v1(2355,3165) v1(2405,3165) ; v1(2405,3115) v1(2405,3165) ; v1(2425,3575) v1(2450,3575) v1(2450,3500) ; v1(2425,3575) v1(2425,3500) v1(2450,3500) ; v1(2775,3560) v1(2825,3560) v1(2825,3535) ; v1(2775,3560) v1(2775,3535) v1(2825,3535) ; v1(2335,2315) v1(2460,2190) v1(2460,2290) v1(2435,2315) v1(2335,2315) ; v1(3860,2060) v1(3990,2060) v1(3990,2200) 3980,2210 v1(3960,2210) 3870,2210 v1(3860,2200) v1(3860,2060)
  Mid-Layer 2 w19.68: v1(2435,2315) 2390,2360 2390,2510 2480,2600 3695,2600 3890,2404.99 v1(3890,2210) 3890,2025 3840,1975 2815,1975 v1(2790,1950)
  Bottom Layer w10: TP1.1@2330,2355 2330,2320 v1(2335,2315) ; v1(3860,2060) v1(3860,2200) 3870,2210 v1(3890,2210) v1(3960,2210) 3980,2210 v1(3990,2200) v1(3990,2060) ; 3990,2155 TP28.1@4054.99,2155
  Bottom Layer w19.68: 2460,2275 v1(2460,2190) v1(2335,2315) v1(2435,2315) v1(2460,2290) ; v1(2800,3535) v1(2775,3560) ; v1(2800,3560) v1(2825,3535) ; 2808.6,1900 2808.6,1931.4 v1(2765,1975) ; v1(2840,1900) v1(2790,1950) ; v1(2890,1900) v1(2790,1900) ; v1(3990,2165) 4000,2155 TP28.1@4054.99,2155 ; v1(2765,1925) v1(2790,1950) ; v1(2765,1925) v1(2765,2025) ; v1(2765,1925) v1(2790,1900) ; v1(2765,1975) v1(2790,1950) ; v1(2765,1975) v1(2790,2000) v1(2765,2025) ; v1(2765,2025) v1(2790,2050) v1(2790,1900) ; v1(2775,3560) v1(2775,3535) v1(2825,3535) ; v1(2775,3560) v1(2825,3560) v1(2825,3535) ; v1(3860,2060) v1(3860,2200) 3870,2210 v1(3925,2210) 3980,2210 v1(3990,2200) v1(3990,2060) v1(3860,2060)
  other v1: 3860,2095 3990,2095 3860,2130 3990,2130 3860,2165 3890,2175 3925,2175 3960,2175 2435,2215 2410,2240 2460,2240 2435,2265 2410,2290 2385,2315 2380,3140
AGND: C11.2 C13.1 D16.2 D17.1 R16.1 S1.25 | length 428.7
  Top Layer w10: C13.1@2890,3764.2 v1(2910,3745) ; C11.2@2930,3764.2 v1(2950,3745) ; v1(3430,3655) 3455,3655 3481.6,3681.6 3481.6,3697.34 3493.05,3708.79 S1.25@3493.05,3745.67 3493.05,3781.94 3484.99,3790 v1(3474.99,3800) v1(3440,3800)
  Mid-Layer 1 w10: v1(3440,3800) v1(3474.99,3800)
  Mid-Layer 2 w10: v1(3440,3800) v1(3474.99,3800)
  Mid-Layer 2 w19.68: v1(2910,3745) v1(2950,3745)
  Bottom Layer w10: v1(3440,3800) v1(3474.99,3800)
  other v1: 3020,3750
AGND1: C5.2 C15.2 C16.1 R15.1 TP27.1 U7.1 U7.7 | length 1047.8
  Top Layer w10: C16.1@4496.45,2955 v1(4496.46,2979.73) C5.2@4496.45,3005 v1(4496.46,3030.23) C15.2@4496.45,3055
  Bottom Layer w5: TP27.1@4449.99,3030 v1(4496.46,3030.23)
  Bottom Layer w10: U7.7@4244.99,3215.61 4245,3245 4225,3265 4130,3265 4115,3250 4115,2970 4135,2950 4280,2950 4295,2965 U7.1@4294.99,3004.39 ; v1(4496.46,2979.73) v1(4496.46,3030.23)
  Bottom Layer w19.68: R15.1@3952.04,3160 4115,3160
AP-RESET: D18.2 GPIO.18 RESET1.1 RESET2.1 S1.16 | length 2851.4
  Top Layer w5: GPIO.18@2937.2,3974.1 2886.3,4025 2810,4025 2790,4005 2790,3805 2775,3790 2775,3760 2790,3745 2815,3745 2825,3755 2825,3770 2875,3820 3010,3820 3025,3805 3315,3805 3345,3775 3345,3560 3410,3495 3410,3485 3404.5,3479.5 S1.16@3404.47,3449.42 ; S1.16@3404.47,3449.42 3404.47,3385.52 v1(3415,3375) ; RESET1.1@4132.48,3237.33 4142.32,3237.32 4178.47,3273.47 RESET2.1@4178.47,3333.22
  Mid-Layer 1 w5: v1(3415,3375) 3415,3330 3590,3155 4000.25,3155 RESET2.1@4178.47,3333.22
  Bottom Layer w10: D18.2@3949.67,3210 4025,3210 4148.2,3333.2 RESET2.1@4178.47,3333.22
B1_2: B1.2 CC1.1 | length 65.8
  Top Layer w10.24: CC1.1@2000.8,3520 2058.98,3520 B1.2@2064.37,3525.39
B1_3: B1.3 CC2.1 | length 87.2
  Top Layer w10.24: CC2.1@2000.8,3480 2057.77,3423.03 B1.3@2064.37,3423.03
C7_1: C7.1 U27.12 X1.3 | length 137.3
  Bottom Layer w5: X1.3@4224.52,2437.4 4258.39,2403.54 C7.1@4284.99,2403.54 4293.97,2394.57 U27.12@4344.13,2394.57
C21_2: C21.2 U27.11 X1.1 | length 232.9
  Bottom Layer w5: X1.1@4165.47,2362.6 4165.5,2334.5 4175,2325 4268.5,2325 C21.2@4284.99,2341.46 ; C21.2@4284.99,2341.46 4284.99,2345 4313.69,2373.7 U27.11@4344.13,2373.7
EPHY-RXN: C17.1 D2.2 RJ2.6 S1.73 TP18.1 | length 2172.9
  Top Layer w5: S1.73@3965.49,3745.67 3965.49,3775.49 3990,3800 4060,3800 4070,3790 4335,3790 4355,3770 4355,3610 4415,3550 4415,3510 4489.3,3435.7 4615.7,3435.7 4635,3455 4635,3515 4615,3535 4540,3535 4515,3560 4515,3720 4505,3730 RJ2.6@4459.96,3730
  Bottom Layer w5: C17.1@4399.2,3260 4379.99,3279.2 4379.99,3403 D2.2@4396.99,3420 4397,3432.1 4404.6,3439.7 4404.6,3559.6 4415,3570 4430,3585 ; RJ2.6@4459.96,3730 4459.96,3699.96 4414.99,3655 4414.99,3600 4430,3585 ; TP18.1@4644.99,3660 4625,3640 4575,3640 4562.8,3627.8 4542.8,3627.8 4500,3585 4430,3585
EPHY-RXP: C18.1 D2.1 RJ2.3 S1.75 TP19.1 | length 1632.8
  Top Layer w5: S1.75@3985.17,3745.67 3985.17,3775.17 4000,3790 4055,3790 4065,3780 4330,3780 4345,3765 4345,3605 4405,3545 4405,3505 4485,3425 4620,3425 4645,3450 4645,3555 4620,3580 RJ2.3@4559.96,3580
  Bottom Layer w5: C18.1@4420.8,3380 4422.99,3382.2 D2.1@4422.99,3420 4423,3432 4415,3440 4415,3555 4435,3575 4555,3575 RJ2.3@4559.96,3580 ; RJ2.3@4559.96,3580 4559.96,3599.96 4584.99,3625 4625,3625 TP19.1@4644.99,3605
EPHY-TXN: C4.2 D3.1 RJ2.2 S1.71 TP20.1 | length 1461.9
  Top Layer w5: S1.71@3945.8,3745.67 3945.8,3775.8 3985,3815 4070,3815 4080,3805 4350,3805 4370,3785 4370,3620 RJ2.2@4459.96,3530
  Bottom Layer w5: D3.1@4422.99,3300 4434.99,3300 4459.99,3325 4459.99,3350 4439.99,3370 4439.99,3435 4429.99,3445 4429.99,3500.04 RJ2.2@4459.96,3530 4625,3530 TP20.1@4644.99,3550 4709.99,3614.99 C4.2@4709.99,3739.2
EPHY-TXP: C29.2 D3.2 RJ2.1 S1.69 TP21.1 | length 1470.2
  Top Layer w5: S1.69@3926.12,3745.67 3926.12,3771.12 3980,3825 4075,3825 4085,3815 4355,3815 4380,3790 4380,3625 4430,3575 4475,3575 4560,3490 RJ2.1@4559.96,3480
  Bottom Layer w5: C29.2@4399.2,3340 4396.99,3337.79 D3.2@4396.99,3300 4397,3288 4405,3280 4435,3280 4475,3320 4475,3355 4455,3375 4455,3440 4445,3450 4445,3475 4455,3485 4555,3485 RJ2.1@4559.96,3480 ; RJ2.1@4559.96,3480 4589.95,3510 4630,3510 TP21.1@4644.99,3495
GND: B1.1 B1.8 C2.1 C3.1 C4.1 C6.1 C7.2 C8.1 C9.1 C10.1 C12.1 C17.2 C18.2 C19.2 C20.2 C21.1 C22.1 C23.1 C24.2 C25.1 C26.1 C27.2 C28.1 C29.1 C30.1 C32.1 C33.1 C34.1 C36.2 C37.2 C39.2 C40.2 C41.2 C42.2 C43.2 C44.2 C45.2 C46.1 C47.2 D4.1 D9.1 D10.1 D11.1 D12.1 D13.1 D14.1 D15.1 D18.1 D19.1 F1.1 F2.1 GND.1 GND.2 J11.4 J11.8 J11.9 J12.4 J12.8 J12.9 LDO1.1 LDO2.1 MICROSD.6 MICROSD.9 MICROSD.10 MICROSD.11 MICROSD.12 MICROSD.13 MICROSD.14 PW1.3 PW1.4 PW2.2 R15.2 R16.2 RESET1.3 RESET1.4 RESET2.2 RF1.2 RF1.3 RF1.4 RF2.2 RF2.3 RF2.4 RJ2.0 S1.0 S1.27 S1.29 S1.31 S1.33 S1.35 S1.37 S1.39 S1.41 S1.43 S1.45 S1.47 TP4.1 U1.1 U1.9 U1.11 U1.18 U1.25 U2.1 U5.3 U5.29 U27.8 X1.2 X1.4 | length 11314.4
  Top Layer w10: U5.3@2511.58,2054.71 2590.3,2054.71 v1(2610,2035.01) ; v1(2515,2130.01) v1(2610,2035.01) ; v1(2705,1940.01) v1(2610,2035.01) ; v1(2705,2130.01) v1(2610,2035.01) ; PW1.3@4132.47,3007.67 4167.3,3007.66 4180,3020.36 4180,3140.36 4167.7,3152.66 RESET1.3@4132.47,3152.68 ; RESET1.3@4132.47,3152.68 4162.68,3152.68 4179.99,3170 4265.4,3170 4282.7,3152.7 ; C19.2@4207.44,2600 C20.2@4207.44,2530 4207.43,2481.1 C2.1@4218.54,2470 C3.1@4218.54,2420 4218.54,2371.78 D14.1@4220.31,2369.99 D13.1@4220.31,2214.99 ; PW1.4@4317.52,3007.67 4282.3,3007.7 4270,3020 4270,3140 4282.7,3152.7 ; RESET1.4@4317.52,3152.68 4282.7,3152.7 ; v1(4365,3260) v1(4365,3240) 4369.99,3235 4467.55,3235 C22.1@4502.55,3270 ; RJ2.0@4680.04,3349.88 4826.81,3203.11 J12.9@4826.81,3178.66
  Top Layer w14.57: 3160,2760 3205,2760 3185,2740 ; 3170,3010 3215,3010 3190,3035 3175,3035
  Top Layer w16.93: 4035,3340 3995,3300 3995,2955 4045,2905 4069.99,2880 4069.99,2860
  Top Layer w19.68: C34.1@3586.45,2065 C46.1@3586.45,2115 C30.1@3586.46,2165 3586.45,2176.46 3605,2195 3665,2195 3686.45,2173.54 C28.1@3686.45,2165 C8.1@3686.45,2115 C33.1@3686.45,2065 3686.45,1984.35 C40.2@3695.8,1975 C37.2@3784.19,1975 C36.2@3784.19,2105 ; J12.4@4616.97,3057.8 J12.8@4720.12,3057.8 ; J11.9@4603.19,2473.66 J11.9@4826.81,2473.66 J12.9@4826.81,2661.34 J12.9@4603.19,2661.34 J11.9@4603.19,2473.66
  Mid-Layer 2 w19.68: v1(1870,3300) v1(1895,3275) ; v1(1970,3300) v1(1995,3275) ; v1(2155,1890) v1(2355,1890) ; v1(2464.99,2400) v1(2465.01,2460) ; v1(2539.98,2435) v1(2540,2495) ; v1(2599.99,3035) v1(2600.01,3095) ; v1(2674.99,2340) v1(2675.01,2400) ; v1(2760,2094.99) 2740.02,2094.99 v1(2705,2130.01) ; v1(2804.99,2455) v1(2805.01,2515) ; v1(2860,2084.99) 2840.01,2084.99 v1(2795,2130) v1(2705,2130.01) ; v1(2890,2084.98) v1(2830,2085) 2750.01,2085 v1(2705,2130.01) ; v1(2940,2130) v1(3149.99,2129.93) ; v1(2990,3570) v1(2990,3590) ; v1(3510,3595) 3510,3585 v1(3520,3575) ; v1(4145,2275) v1(4120,2300) ; v1(4145,2300) v1(4170,2275) ; v1(4155,2485) v1(4180,2510) ; v1(4155,2510) v1(4130,2485) ; v1(4365,3240) v1(4365,3260) ; v1(4390,2855) v1(4410,2855) ; v1(1925,2585) v1(1945,2605) ; v1(1925,2585) v1(1945,2585) v1(1945,2605) ; v1(1925,2585) v1(1925,2605) v1(1945,2605) ; v1(2200,3005) v1(2220,3025) ; v1(2200,3005) v1(2220,3005) v1(2220,3025) ; v1(2200,3005) v1(2200,3025) v1(2220,3025) ; v1(2215,2570) v1(2235,2590) ; v1(2215,2570) v1(2235,2570) v1(2235,2590) ; v1(2215,2570) v1(2215,2590) v1(2235,2590) ; v1(2215,3370) v1(2235,3390) ; v1(2215,3370) v1(2235,3370) v1(2235,3390) ; v1(2215,3370) v1(2215,3390) v1(2235,3390) ; v1(2325,3575) v1(2345,3595) ; v1(2325,3575) v1(2345,3575) v1(2345,3595) ; v1(2325,3575) v1(2325,3595) v1(2345,3595) ; v1(2520,2745) v1(2540,2765) ; v1(2520,2745) v1(2540,2745) v1(2540,2765) ; v1(2520,2745) v1(2520,2765) v1(2540,2765) ; v1(2595,3550) v1(2620,3575) ; v1(2595,3550) v1(2620,3550) v1(2620,3575) ; v1(2595,3550) v1(2595,3575) v1(2620,3575) ; v1(3180,3195) v1(3200,3215) ; v1(3180,3195) v1(3200,3195) v1(3200,3215) ; v1(3180,3195) v1(3180,3215) v1(3200,3215) ; v1(3285,3555) v1(3305,3575) ; v1(3285,3555) v1(3305,3555) v1(3305,3575) ; v1(3285,3555) v1(3285,3575) v1(3305,3575) ; v1(3325,3040) v1(3345,3060) ; v1(3325,3040) v1(3345,3040) v1(3345,3060) ; v1(3325,3040) v1(3325,3060) v1(3345,3060) ; v1(3345,3440) v1(3365,3460) ; v1(3345,3440) v1(3365,3440) v1(3365,3460) ; v1(3345,3440) v1(3345,3460) v1(3365,3460) ; v1(3520,3320) v1(3540,3340) ; v1(3520,3320) v1(3540,3320) v1(3540,3340) ; v1(3520,3320) v1(3520,3340) v1(3540,3340) ; v1(3655,2800) v1(3675,2820) ; v1(3655,2800) v1(3675,2800) v1(3675,2820) ; v1(3655,2800) v1(3655,2820) v1(3675,2820) ; v1(3905,3065) v1(3925,3045) ; v1(3905,3065) v1(3925,3065) v1(3925,3045) ; v1(3905,3065) v1(3905,3045) v1(3925,3045) ; v1(3920,2780) v1(3940,2800) ; v1(3920,2780) v1(3940,2780) v1(3940,2800) ; v1(3920,2780) v1(3920,2800) v1(3940,2800) ; v1(4015,2575) v1(4035,2595) ; v1(4015,2575) v1(4035,2575) v1(4035,2595) ; v1(4015,2575) v1(4015,2595) v1(4035,2595) ; v1(4120,2300) v1(4170,2300) v1(4170,2275) ; v1(4120,2300) v1(4120,2275) v1(4170,2275) ; v1(4130,2485) v1(4180,2485) v1(4180,2510) ; v1(4130,2485) v1(4130,2510) v1(4180,2510) ; v1(4320,2780) v1(4340,2760) ; v1(4320,2780) v1(4340,2780) v1(4340,2760) ; v1(4320,2780) v1(4320,2760) v1(4340,2760) ; v1(4355,3960) v1(4375,3940) ; v1(4355,3960) v1(4355,3940) v1(4375,3940) ; v1(4355,3960) v1(4375,3960) v1(4375,3940) ; v1(4385,3110) v1(4405,3090) ; v1(4385,3110) v1(4385,3090) v1(4405,3090) ; v1(4385,3110) v1(4405,3110) v1(4405,3090) ; v1(4845,3635) v1(4865,3635) v1(4865,3615) ; v1(4845,3635) v1(4865,3615) ; v1(4845,3635) v1(4845,3615) v1(4865,3615) ; v1(4930,2215) v1(4950,2235) ; v1(4930,2215) v1(4950,2215) v1(4950,2235) ; v1(4930,2215) v1(4930,2235) v1(4950,2235) ; v1(4965,2975) v1(4985,2955) ; v1(4965,2975) v1(4985,2975) v1(4985,2955) ; v1(4965,2975) v1(4965,2955) v1(4985,2955) ; v1(4969.99,3315) v1(4989.99,3295) ; v1(4969.99,3315) v1(4969.99,3295) v1(4989.99,3295) ; v1(4969.99,3315) v1(4989.99,3315) v1(4989.99,3295) ; v1(5014.99,3960) v1(5034.99,3940) ; v1(5014.99,3960) v1(5014.99,3940) v1(5034.99,3940) ; v1(5014.99,3960) v1(5034.99,3960) v1(5034.99,3940) ; v1(5029.99,1990) v1(5049.99,1970) ; v1(5029.99,1990) v1(5049.99,1990) v1(5049.99,1970) ; v1(5029.99,1990) v1(5029.99,1970) v1(5049.99,1970) ; v1(5034.99,2590) v1(5054.99,2570) ; v1(5034.99,2590) v1(5034.99,2570) v1(5054.99,2570) ; v1(5034.99,2590) v1(5054.99,2590) v1(5054.99,2570) ; 1835,3485 v1(1835,3610) 1870,3575 v1(1870,3450) v1(1845,3475) 1835,3485 ; v1(3055,3420) v1(3080,3420) v1(3080,3505) v1(3055,3505) v1(3055,3420) ; v1(3725,2050) 3730,2045 3795,2045 3825,2075 3825,2200 v1(3725,2200) v1(3725,2050)
  Mid-Layer 2 w78.74: GND.1@4178.5,3532.8 GND.2@4278.5,3532.8 RESET2.2@4278.47,3333.22
  Bottom Layer w5: v1(4365,3240) 4369.99,3245 4386.82,3245 ; v1(4365,3260) 4379.99,3245 4414.99,3245 4420.79,3250.79 C17.2@4420.8,3260 ; C18.2@4399.2,3380 4399.2,3370.79 4420.79,3349.2 C29.1@4420.8,3340 v1(4440,3340)
  Bottom Layer w10: TP4.1@1965,2355 1965,2289.99 1970,2285 ; U1.9@2009.83,3391.26 2009.84,3459.66 U1.25@2000,3469.51 2049.7,3519.2 U1.1@2078.74,3519.19 ; v1(2990,3590) v1(2990,3570) 3065,3570 3092.04,3597.04 R16.2@3092.04,3620 ; v1(4365,3240) v1(4365,3260) ; U27.8@4485.86,2331.97 4513.02,2331.97 4524.99,2320 v1(4525,2305)
  Bottom Layer w19.68: MICROSD.6@1884.83,2866.95 v1(1924.83,2866.95) ; MICROSD.10@1885.81,3180.34 v1(1925.81,3180.34) ; v1(1892.7,2692.7) MICROSD.9@1892.7,2732.7 ; v1(2121.05,3135) MICROSD.11@2121.05,3187.23 ; v1(2155,1890) v1(2355,1890) ; v1(2266.72,3135) MICROSD.12@2266.72,3187.23 ; v1(2305,2765) MICROSD.14@2305.1,2814.39 ; MICROSD.13@2305.1,3049.43 v1(2345.1,3049.44)
  other v1: 1920,1885 2205,1890 2255,1890 2305,1890 1845,1960 1845,2010 1845,2060 3725,2075 2790,2095 3725,2100 3725,2125 2735,2130 2765,2129.99 2970,2129.99 3000,2129.98 3030,2129.97 3060,2129.96 3089.99,2129.95 3119.99,2129.94 3725,2150 3725,2175 3750,2175 3775,2175 3800,2175 3750,2200 3775,2200 3800,2200 2675,2370 2465,2430 2539.99,2465 2805,2485 2825,3040.01 2855,3040 2885,3039.99 2600,3065 2990,3255 2045,3275 2990,3280 2990,3305 2990,3330 4015,3450 4035,3450 3055,3465 3080,3465 4015,3470 4035,3470 1870,3500 1845,3525 3835,3525 1870,3550 1845,3575 3575,3595 3645,3665 1970,3700 3560,3700 3585,3700 3610,3700 3635,3700 3660,3700 3685,3700 1945,3725 2665,3740 1920,3750 1970,3750 1945,3775 3537.33,3791.35 3562.33,3791.35 3587.33,3791.35 3612.33,3791.35 3637.33,3791.35 3662.33,3791.35 3687.33,3791.35 1870,3800 1920,3800 1970,3800 1845,3825 1895,3825 1870,3850 1845,3875 1940,4030 1975,4030 2485,4035 2585,4035 2685,4035 2985,4035 3085,4035
GPIO0-MPU_SDA: GPIO.27 S1.62 U1.24 | length 2426.9
  Top Layer w5: v1(3505,3685) 3535,3655 3610,3655 3723.7,3541.3 3728.7,3541.3 3750,3520 3750,3505 3755,3500 3840,3500 3857.21,3482.79 S1.62@3857.22,3449.42
  Mid-Layer 2 w5: GPIO.27@3437.2,3874.1 3437.2,3862.2 3400,3825 3400,3775 3490,3685 v1(3505,3685)
  Bottom Layer w5: U1.24@2049.2,3548.74 2049.2,3579.2 2060,3590 2120,3590 2170,3640 2365,3640 2395,3610 2880,3610 2955,3535 3165,3535 3205,3495 3320,3495 3465,3640 3510,3640 3520,3650 3520,3670 v1(3505,3685)